# EAGLE board 2x6x1.27mm-pogo-adapter-mk-1.0.2 (EAGLE 9.2.2)
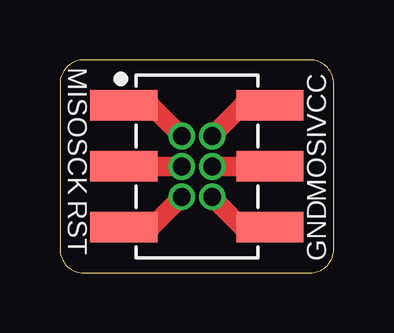
[diagram p0: board, top side]
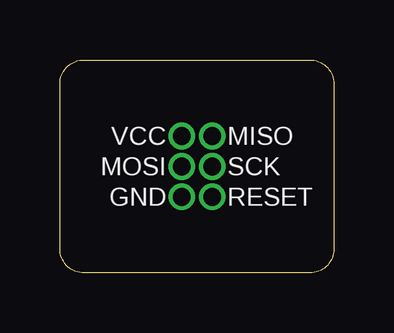
[diagram p1: board, bottom side, seen from below]

Size 11.43 x 8.89 mm. Coordinates in mm from the lower left corner, seen from the top.
Outline: 0,7.89 0,1 arc90 1,0 10.43,0 arc90 11.43,1 11.43,7.89 arc90 10.43,8.89 1,8.89 arc90 0,7.89
Copper layers (1*16): Top 0.0356mm / dielectric 1.5011mm / Bottom 0.0356mm
Design rules "LaenPCBOrder_2": minimum track width 6mil, minimum drill 13mil, track to track 6mil, track to pad 6mil, pad to pad 6mil, via to via 6mil, smd to smd 6mil, copper to edge 15mil, drill to drill 6mil, minimum pad ring 7mil, minimum via ring 7mil, stop-mask expansion 3mil, vias tented up to drill 20mil, thermal gap 10mil

## Footprints (pad centres in the part's own frame; a part is rotated, then mirrored left to right if it is on the bottom)
2X3_SMD = smd 1.27 x 2.794: 1 -2.54,-3.048; 2 -2.54,3.048; 3 0,-3.048; 4 0,3.048; 5 2.54,-3.048; 6 2.54,3.048

## Placement (x,y rotation side)
AVR_ISP  AVR_SPI_PRG_62X3_SMD  [2X3_SMD]  5.71,4.45 270 top
FRAME1  FRAME-LETTERNO_PACKAGE  [DUMMY]  0,0 0 top

## Library data of the parts
AVR_ISP = a_parts
FRAME1 = a_parts; DESIGNER: Nobody; VERSION: v01

## Nets
1: AVR_ISP.1
2: AVR_ISP.2
3: AVR_ISP.3
4: AVR_ISP.4
5: AVR_ISP.5
6: AVR_ISP.6

## Tracks (layer width: path | path; a pad name or v marks a point on that pad's centre or on a via)
1  (via drill 0.74)
  Top 0.813: AVR_ISP.1 3.81,6.99 v5.08,5.71
2  (via drill 0.74)
  Top 0.813: AVR_ISP.2 7.62,6.99 v6.35,5.71
3  (via drill 0.74)
  Top 0.813: AVR_ISP.3 v5.08,4.45
4  (via drill 0.74)
  Top 0.813: AVR_ISP.4 v6.35,4.45
5  (via drill 0.74)
  Top 0.813: AVR_ISP.5 3.81,1.91 v5.08,3.17
6  (via drill 0.74)
  Top 0.813: AVR_ISP.6 7.62,1.91 v6.35,3.17

## Text on the board
bPlace: MISO | VCC | SCK | MOSI | RESET | GND
tNames: MISO | VCC | SCK | MOSI | RST | GND